# EAGLE board LIS344ALH-old (EAGLE 9.6.2)
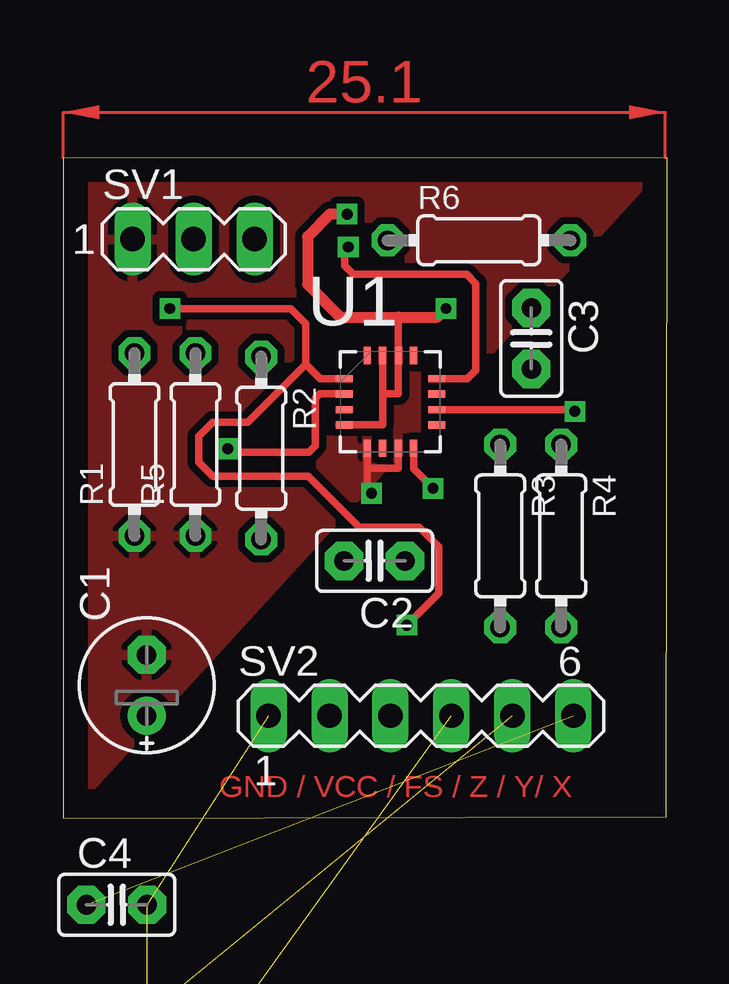
[diagram p0: board, top side]
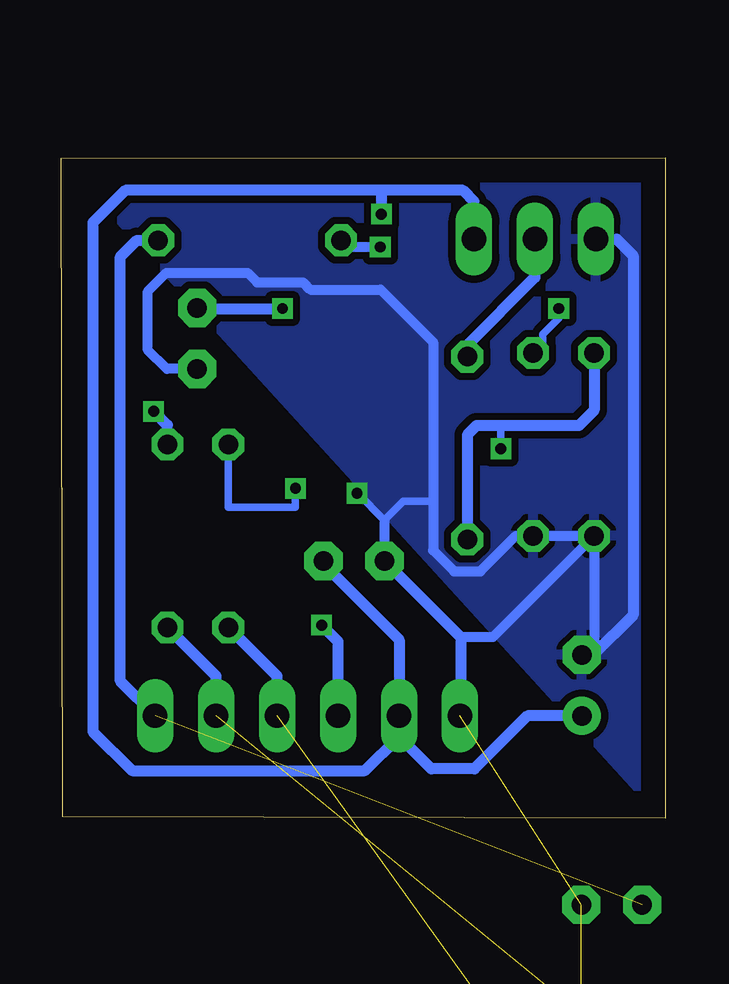
[diagram p1: board, bottom side, seen from below]

Size 25.17 x 27.52 mm. Coordinates in mm from the lower left corner, seen from the top.
Outline: 0,0 25.12,0.05 25.17,27.5 0,27.52 0,0
Copper layers (1*16): Top 0.035mm / dielectric 1.5mm / Bottom 0.035mm
Design rules "default *": minimum track width 10mil, minimum drill 1mm, track to track 12mil, track to pad 18mil, pad to pad 18mil, via to via 18mil, smd to smd 6mil, copper to edge 40mil, drill to drill 6mil, minimum pad ring 10mil, minimum via ring 8mil, stop-mask expansion 4mil, vias tented up to drill 0mil, thermal gap 10mil

## Footprints (pad centres in the part's own frame; a part is rotated, then mirrored left to right if it is on the bottom)
E2,5-6E = drill 0.813 pad 1.575: + -1.27,0 | drill 0.813 pad 1.575 octagon: - 1.27,0
C2.5-2 = drill 0.813 pad 1.6 octagon: 1 -1.27,0; 2 1.27,0
0204/7 = drill 0.813 octagon: 1 -3.81,0; 2 3.81,0
MA03-1 = drill 1.016 long: 1 -2.54,0; 2 0,0; 3 2.54,0
MA06-1 = drill 1.016 long: 1 -6.35,0; 2 -3.81,0; 3 -1.27,0; 4 1.27,0; 5 3.81,0; 6 6.35,0
LGA16R65P4X4_400X400X160 = smd 0.711 x 0.305: 1 -1.93,0.965; 2 -1.93,0.33; 3 -1.93,-0.33; 4 -1.93,-0.965; 9 1.93,-0.965; 10 1.93,-0.33; 11 1.93,0.33; 12 1.93,0.965 | smd 0.305 x 0.711: 5 -0.965,-1.93; 6 -0.33,-1.93; 7 0.33,-1.93; 8 0.965,-1.93; 13 0.965,1.93; 14 0.33,1.93; 15 -0.33,1.93; 16 -0.965,1.93

## Placement (x,y rotation side)
C1  2.2uF  [E2,5-6E]  3.48,5.54 90 top
C2  100nF  [C2.5-2]  12.98,10.72 180 top
C3  100nF  [C2.5-2]  19.51,19.99 270 top
C4  100nF  [C2.5-2]  2.24,-3.61 0 top  (outside the outline)
C5  100nF  [C2.5-2]  2.24,-10.26 0 top  (outside the outline)
C6  100nF  [C2.5-2]  2.24,-16.92 0 top  (outside the outline)
R1  100k  [0204/7]  2.97,15.57 90 top
R2  1k  [0204/7]  8.26,15.42 270 top
R3  1k  [0204/7]  18.21,11.76 270 top
R4  1k  [0204/7]  20.75,11.76 270 top
R5  100k  [0204/7]  5.51,15.57 90 top
R6  1k  [0204/7]  17.32,24.08 0 top
SV1  [MA03-1]  5.44,24.13 0 top
SV2  [MA06-1]  14.91,4.27 0 top
U1  LIS344ALH  [LGA16R65P4X4_400X400X160]  13.64,17.35 0 top

## Library data of the parts
C1 = rcl; SPICEPREFIX: C
C2-C6 = capacitor-wima
R1-R6 = rcl; SPICEPREFIX: R
SV1 SV2 = con-lstb; OC_FARNELL: unknown; OC_NEWARK: unknown
U1 = LIS344ALH; AVAILABILITY: In Stock; CHECK_PRICES: https://www.snapeda.com/parts/LIS344ALH/STMicroelectronics/view-part/?ref=eda; DESCRIPTION: Accelerometer X, Y, Z Axis ±2g, 6g 1.8kHz 16-LGA (4x4); MF: STMicroelectronics; MP: LIS344ALH; PACKAGE: LGA-16 STMicroelectronics; PRICE: None; SNAPEDA_LINK: https://www.snapeda.com/parts/LIS344ALH/STMicroelectronics/view-part/?ref=snap

## Nets
GND: C1.- C2.2 C3.2 C4.2 C5.2 C6.2 R1.1 R5.1 SV1.1 SV2.1 U1.5 U1.7
N$1: R6.1 U1.12
N$2: R4.1 U1.10
N$3: R3.1 U1.8
N$4: C4.1 R6.2 SV2.6
N$5: C5.1 R4.2 SV2.5
N$6: C6.1 R3.2 SV2.4
N$7: R2.1 SV1.2
N$8: R1.2 R2.2 U1.2
N$11: R5.2 SV2.3 U1.1
VCC: C1.+ C2.1 C3.1 SV1.3 SV2.2 U1.4 U1.14 U1.15

## Tracks (layer width: path | path; a pad name or v marks a point on that pad's centre or on a via)
GND  (via drill 0.45)  (3 unrouted)
  Top 0.305: U1.5 12.67,14.58 | 12.67,14.58 13.97,14.58 U1.7 | 12.67,14.58 12.67,13.72 v12.85,13.54
  Bottom 0.305: 9.68,13.28 9.75,13.21 10.92,13.21 11.71,12.42 12.83,13.54 v12.85,13.54
  Bottom 0.406: R1.1 R5.1 6.23,11.76 7.71,10.29 8.8,10.29 9.68,11.16 9.68,13.28 9.68,19.84 11.86,22.02 14.79,22.02 15.1,22.32 17.01,22.32 17.41,22.72 20.79,22.72 21.56,21.95 21.56,19.51 20.78,18.72 C3.2 | R1.1 7.19,7.54 8.53,7.54 | R1.1 2.97,7.32 C1.- | 11.71,12.42 C2.2
  Bottom 0.457: SV2.1 8.53,4.29 8.53,7.54 C2.2 | SV1.1 2.03,24.13 1.35,23.44 1.35,8.46 3,6.81 C1.-
  pour Top: 0,27.53 25.15,27.53 0,0.05
  pour Bottom: 0,27.53 25.1,27.53 0,0.03
N$1  (via drill 0.45)
  Top 0.305: U1.12 16.84,18.31 17.2,18.67 17.2,22.28 16.81,22.66 12.09,22.66 11.73,23.01 11.73,23.8 v11.88,23.8
  Bottom 0.406: R6.1 13.23,23.8 v11.88,23.8
N$2  (via drill 0.4, 0.45)
  Top 0.305: v21.32,16.95 21.26,17.02 U1.10
  Bottom 0.457: v21.32,16.95 20.75,16.38 R4.1
N$3  (via drill 0.45)
  Top 0.305: U1.8 14.6,14.55 v15.41,13.75
  Bottom 0.305: R3.1 18.21,12.96 15.41,12.96 v15.41,13.75
N$4  (1 unrouted)
  Bottom 0.457: SV2.6 22.71,5.72 22.71,23.39 22.02,24.08 R6.2
N$5  (1 unrouted)
  Bottom 0.457: SV2.5 18.72,5.92 R4.2
N$6  (1 unrouted)
  Bottom 0.457: SV2.4 16.18,5.92 R3.2
N$7
  Bottom 0.457: R2.1 8.25,19.71 5.44,22.53 SV1.2
N$8  (via drill 0.45)
  Top 0.305: U1.2 10.69,17.68 10.52,17.5 10.52,15.52 10.24,15.24 7.01,15.24 v6.86,15.39
  Bottom 0.305: 6.86,16.36 v6.86,15.39
  Bottom 0.457: R1.2 2.97,16.99 3.61,16.36 6.86,16.36 7.87,16.36 8.25,15.98 R2.2
N$11  (via drill 0.45)
  Top 0.305: U1.1 10.72,18.31 10.11,18.92 | 10.11,18.92 10.11,20.6 9.47,21.23 v4.44,21.23 | 10.11,18.92 7.69,16.51 6.23,16.51 5.64,15.92 5.64,14.84 6.23,14.25 10.21,14.25 12.33,12.13 14.83,12.13 15.66,11.3 15.66,9.37 v14.32,8.04
  Bottom 0.305: v4.44,21.23 4.44,20.83 5.11,20.17 5.11,19.79 R5.2
  Bottom 0.457: v14.32,8.04 13.64,7.36 SV2.3
VCC  (via drill 0.45)
  Top 0.305: U1.4 13.31,16.38 13.31,17.68 | U1.15 13.31,17.68 | 13.31,17.68 13.97,17.68 U1.14 13.97,20.88
  Top 0.457: v15.95,21.23 15.6,20.88 13.97,20.88 11.56,20.88 10.19,22.25 10.19,24.23 11.12,25.17 v11.84,25.17
  Bottom 0.457: C2.1 14.25,10.59 11.1,7.44 SV2.2 11.1,3.4 | C1.+ 5.75,4.27 7.96,2.06 9.75,2.06 11.1,3.4 | SV1.3 7.98,25.71 8.43,26.16 11.84,26.16 | 11.84,26.16 22.5,26.16 23.85,24.82 23.85,3.61 22.22,1.98 12.52,1.98 11.1,3.4 | C3.1 19.48,21.23 v15.95,21.23 | 11.84,26.16 v11.84,25.17
(copper drawn outside any net)
  shapes: Top area x1

## Text on the board
Top: GND / VCC / FS / Z / Y/ X